# Altium PCB Sensor Brushless Driver V1.0 (Production).PcbDoc (part 1 of 2)
Units mil, origin at the board's own origin, x right, y up, seen from the top; angles counter-clockwise.
Board outline 3550 x 3910 mil, 2 copper layers (Top Layer, Bottom Layer); 141 components, 73 nets, 378 pads, 824 vias.
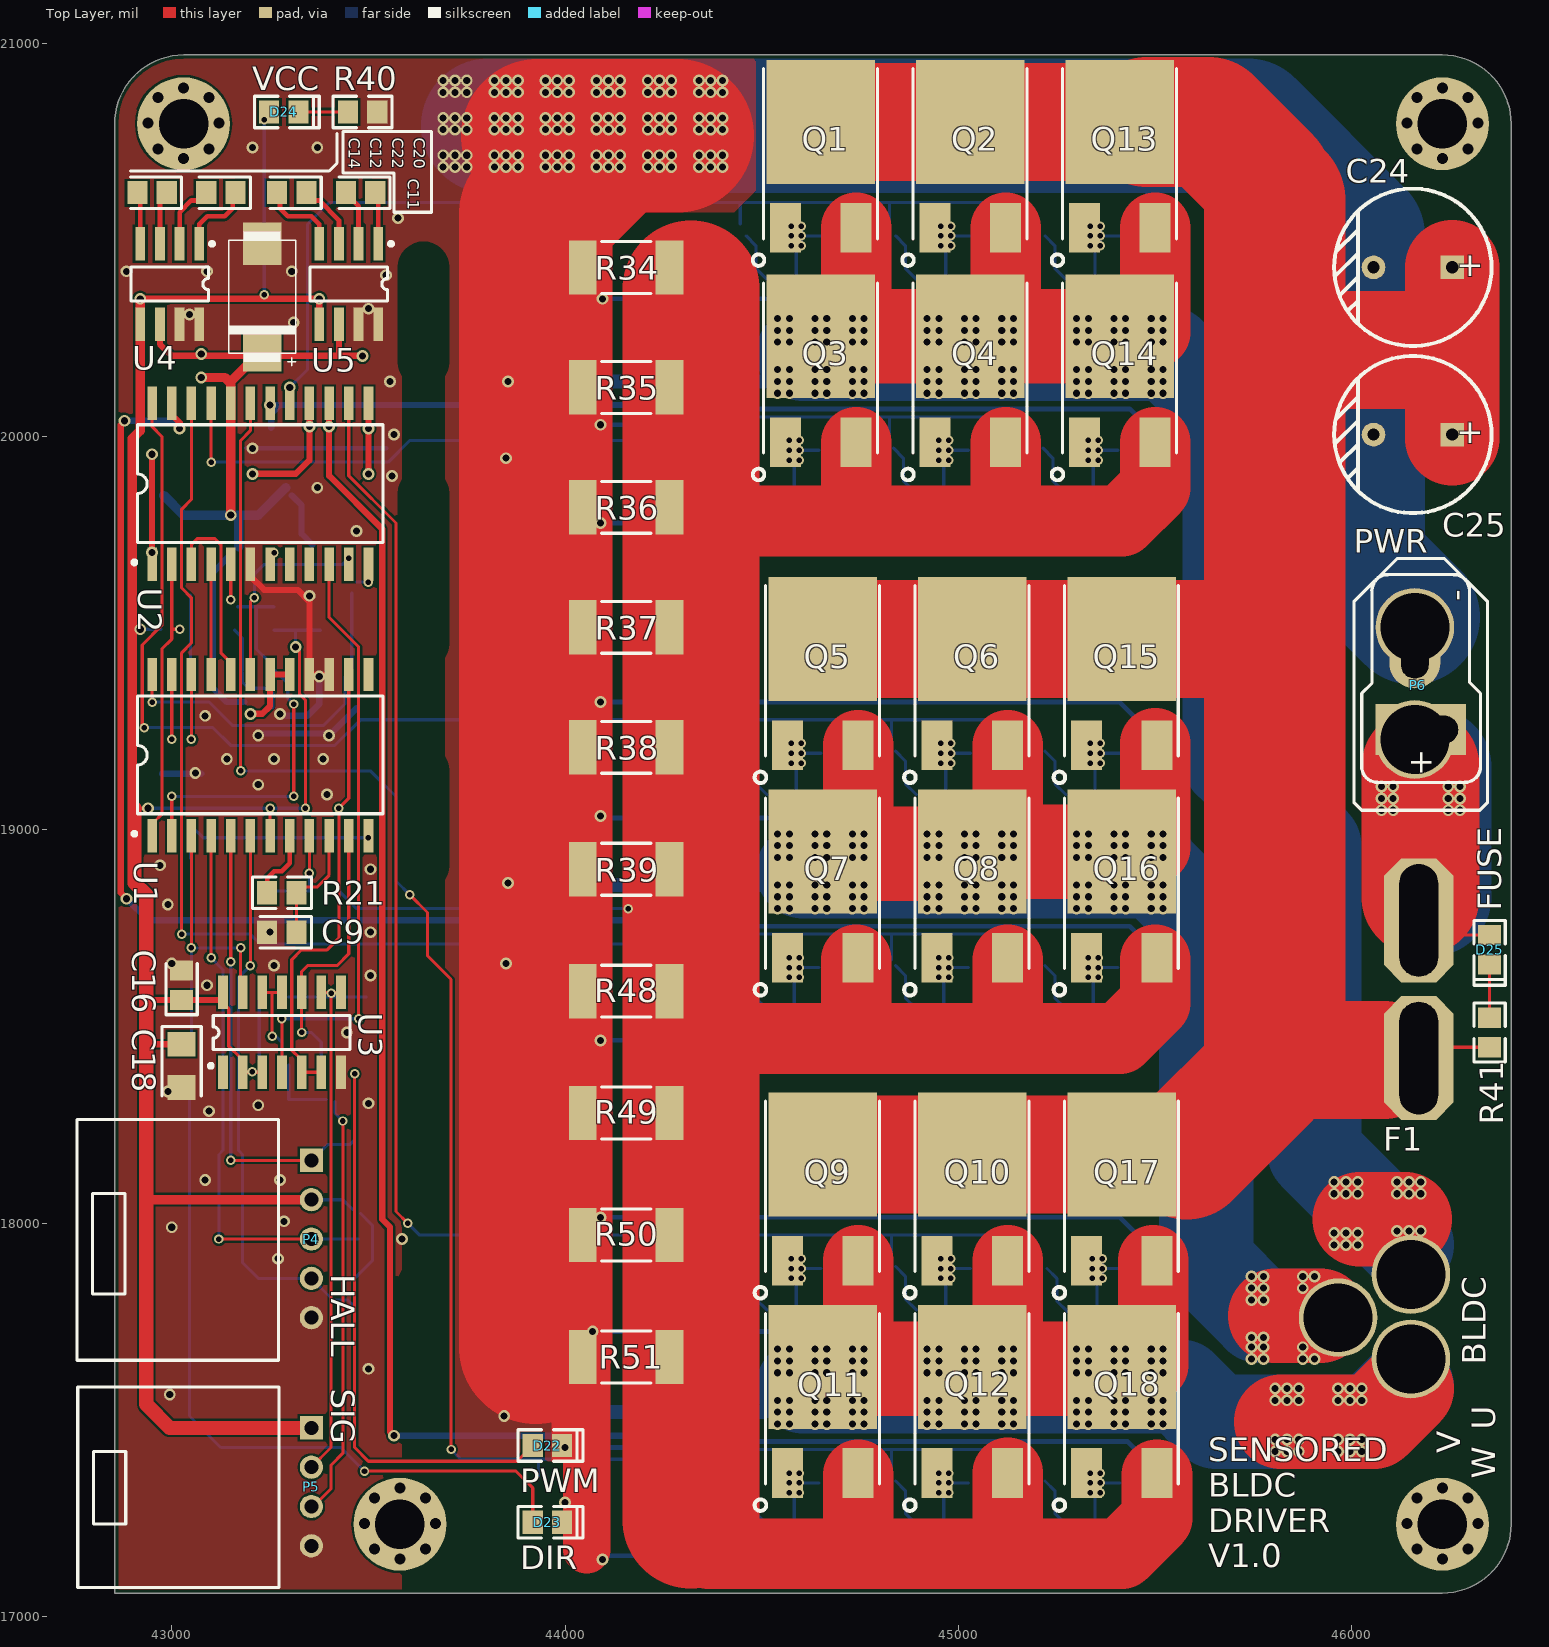
[diagram p0: Top Layer view]
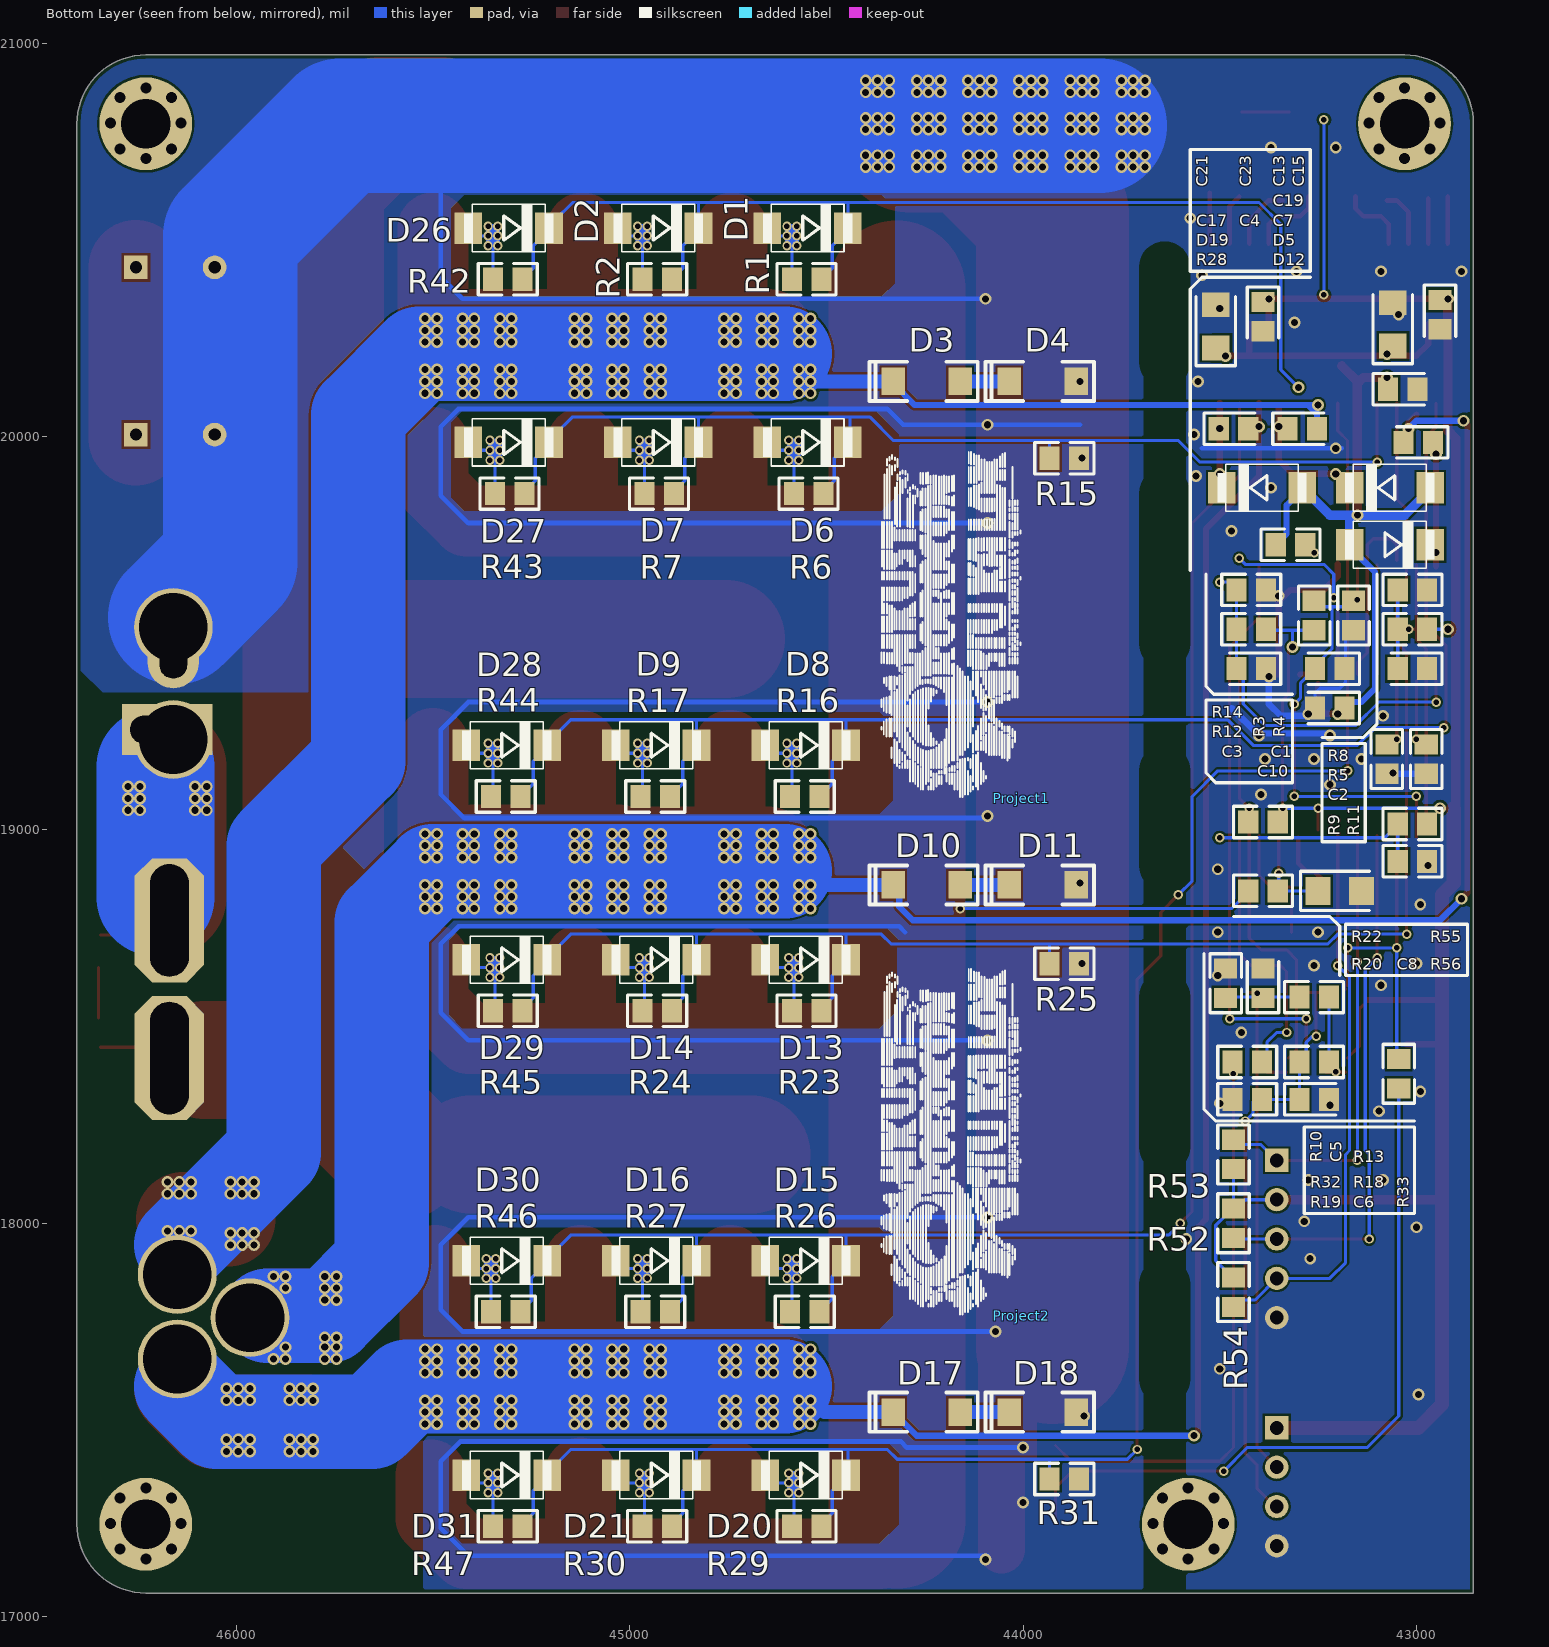
[diagram p1: Bottom Layer view, seen from below]

## Layer stack, top to bottom
Top Solder: solder mask 0.4, Solder Resist, Dk 3.5
Top Layer: signal copper 1.4
Dielectric1: dielectric 12.6, FR-4, Dk 4.8
Bottom Layer: signal copper 1.4
Bottom Solder: solder mask 0.4, Solder Resist, Dk 3.5

## Board outline
42855,17060 46230,17060 ccw(c46230,17235) 46405,17235 46405,20795 ccw(c46230,20795) 46230,20970 43030,20970 ccw(c43030,20795) 42855,20795

## Design rules (kind name [scope] priority, off if disabled: settings)
AssemblyTestPointUsage [All] p1 off:
AssemblyTestpoint [All] p1 off: testpointundercomponent=TRUE minsize=40 maxsize=100 preferedsize=60 minholesize=0 maxholesize=40 preferedholesize=32 testpointgrid=1 usegrid=TRUE gridtolerance=0.01 allowsidetop=TRUE allowsidebottom=TRUE
Clearance [All] p1: gap=6
ComponentClearance [All] p1 off: gap=10 collisioncheckmode=3 verticalgap=10 showdistances=FALSE
DiffPairsRouting [All] p1: maxlimit=9999 minlimit=6 mostfreqgap=10 toplayer_minwidth=6 toplayer_maxwidth=9999 toplayer_prefwidth=10 bottomlayer_minwidth=6 bottomlayer_maxwidth=9999 bottomlayer_prefwidth=10 maxuncoupledlength=500
FabricationTestPointUsage TestPointUsage [All] p1 off: valid=0 allowmultiple=FALSE
FabricationTestpoint Testpoint [(IsPad And (OnTopLayer Or OnBottomLayer))] p1 off: side=3 testpointundercomponent=TRUE minsize=40 maxsize=100 preferedsize=60 minholesize=0 maxholesize=40 preferedholesize=32 testpointgrid=1 allowsidetop=TRUE allowsidebottom=TRUE usegrid=TRUE gridtolerance=0.01
FanoutControl Fanout_BGA [IsBGA] p1 off: bgadir=Out bgaviamode=Centered fanoutstyle=Auto fanoutdirection=Alternating viagrid=1 // Fanout_BGA (Default Rule)
FanoutControl Fanout_LCC [IsLCC] p2 off: bgadir=Out bgaviamode=Centered fanoutstyle=Auto fanoutdirection=Alternating viagrid=1 // Fanout_LCC (Default Rule)
FanoutControl Fanout_SOIC [IsSOIC] p3 off: bgadir=Out bgaviamode=Centered fanoutstyle=Auto fanoutdirection=Alternating viagrid=1 // Fanout_SOIC (Default Rule)
FanoutControl Fanout_Small [(CompPinCount < 5)] p4 off: bgadir=Out bgaviamode=Centered fanoutstyle=Auto fanoutdirection=OutThenIn viagrid=1 // Fanout_Small (Default Rule)
FanoutControl Fanout_Default [All] p5 off: bgadir=Out bgaviamode=Centered fanoutstyle=Auto fanoutdirection=Alternating viagrid=1 // Fanout_Default (Default Rule)
Height [All] p1 off: minheight=0 maxheight=1000 prefheight=500
HoleSize [All] p1: absolutevalues=TRUE maxlimit=99999 minlimit=12 maxpercent=80.000 minpercent=20.000
HoleToHoleClearance [All] p1 off: gap=10 allowstackedmicrovias=TRUE
LayerPairs [All] p1 off: enforce=TRUE
MinimumSolderMaskSliver [All] p1 off: minsoldermaskwidth=10
NetAntennae [All] p1 off: netantennaetolerance=0
PasteMaskExpansion [All] p1 off: expansion=0
PolygonConnect [All] p1: connectstyle=Direct reliefconductorwidth=18 reliefentries=4 polygonreliefangle="90 Angle" airgapwidth=10
RoutingLayers [All] p1 off: top layer_v5=TRUE bottom layer_v5=TRUE
RoutingPriority [All] p1 off: routingpriority=0
RoutingTopology [All] p1 off: topology=Shortest
RoutingVias [All] p1: holewidth=25 width=45 viastyle="Through Hole" minholewidth=12 minwidth=15 maxholewidth=99999 maxwidth=99999
SilkToBoardRegionClearance [All] p1 off:
SilkToSilkClearance [All] p1 off: silktosilkclearance=10
SilkToSolderMaskClearance SilkscreenOverComponentPads [IsPad] p1 off: minsilkscreentomaskgap=10 clearancetoexposedcopper=TRUE
SolderMaskExpansion [All] p1 off: expansion=4
UnpouredPolygon [All] p1: allowunpoured=FALSE
Width [All] p1: maxlimit=99999 minlimit=6 preferedwidth=8 minimp=50.000000 maximp=50.000000 favimp=50.000000
5 further rules are at their usual default settings.

## Components (designator, comment, footprint, x,y, rotation, side; value= is the part's Value field where it differs from the comment)
C1 "10nF" CC2012-0805 43220,19410 r0 bottom
C2 "10nF" CC2012-0805 43010,19410 r0 bottom
C3 "10nF" CC2012-0805 43420,19410 r0 bottom
C4 "4.7uF" CC2012-0805 43290,20020 r180 bottom
C5 "100nF" CC2012-0805 43390,18610 r90 bottom
C6 "100nF" CC2012-0805 43260,18315 r180 bottom
C7 "4.7uF" CC2012-0805 42995,19985 r0 bottom
C8 "10uF" CC3216-1206 43195,18845 r180 bottom
C9 "10nF" CC2012-0805 43280,18740 r180 top
C10 "100nF" CC2012-0805 43220,19310 r0 bottom
C11 "100uF" EIA7343 43230,20355 r270 top
C12 "220nF" CC2012-0805 43125,20620 r180 top
C13 "10uF" CC3216-1206 43060,20285 r90 bottom
C14 "220nF" CC2012-0805 42950,20620 r180 top
C15 "4.7uF" CC2012-0805 42940,20310 r270 bottom
C16 "100nF" CC2012-0805 43025,18605 r90 top
C17 "4.7uF" CC2012-0805 43465,20020 r180 bottom
C18 "10uF" CC3216-1206 43025,18400 r270 top
C19 "100nF" CC2012-0805 43035,20120 r180 bottom
C20 "220nF" CC2012-0805 43480,20620 r180 top
C21 "10uF" CC3216-1206 43510,20280 r90 bottom
C22 "220nF" CC2012-0805 43305,20620 r180 top
C23 "4.7uF" CC2012-0805 43390,20305 r270 bottom
C24 "470uF" CAP10x12 46155,20430 r180 top
C25 "470uF" CAP10x12 46155,20005 r180 top
D1 "MBRS120" SMA 44560,20530 r0 bottom
D2 "MBRS120" SMA 44940,20530 r0 bottom
D3 "1N4148" SOD-80 44245,20140 r0 bottom
D4 "1N4148" SOD-80 43950,20140 r0 bottom
D5 "MBRS120" SMA 43055,19870 r180 bottom
D6 "MBRS120" SMA 44560,19985 r0 bottom
D7 "MBRS120" SMA 44940,19985 r0 bottom
D8 "MBRS120" SMA 44565,19215 r0 bottom
D9 "MBRS120" SMA 44945,19215 r0 bottom
D10 "1N4148" SOD-80 44245,18860 r0 bottom
D11 "1N4148" SOD-80 43950,18860 r0 bottom
D12 "MBRS120" SMA 43080,19725 r0 bottom
D13 "MBRS120" SMA 44565,18670 r0 bottom
D14 "MBRS120" SMA 44945,18670 r0 bottom
D15 "MBRS120" SMA 44565,17905 r0 bottom
D16 "MBRS120" SMA 44945,17905 r0 bottom
D17 "1N4148" SOD-80 44245,17520 r0 bottom
D18 "1N4148" SOD-80 43950,17520 r0 bottom
D19 "MBRS120" SMA 43380,19870 r180 bottom
D20 "MBRS120" SMA 44565,17360 r0 bottom
D21 "MBRS120" SMA 44945,17360 r0 bottom
D22 "PWM" D0805 43955,17435 r0 top
D23 "DIR" D0805 43955,17240 r0 top
D24 "VCC" D0805 43285,20825 r0 top
D25 "FUSE" D0805 46350,18695 r270 top
D26 "MBRS120" SMA 45320,20530 r0 bottom
D27 "MBRS120" SMA 45320,19985 r0 bottom
D28 "MBRS120" SMA 45325,19215 r0 bottom
D29 "MBRS120" SMA 45325,18670 r0 bottom
D30 "MBRS120" SMA 45325,17905 r0 bottom
D31 "MBRS120" SMA 45325,17360 r0 bottom
F1 "20A Fuse" "FUSE SOCKET" 46170,18165 r90 top
P4 "HALL" LOCKEDHDR-5W 43355,17960 r270 top
P5 "SIG" LOCKEDHDR-4W 43355,17330 r270 top
P6 "PWR" T-CONNECTOR(M) 46175,19255 r90 top
Project1 "Project Logo" Robocon_Logo 44005,19080 r90 bottom
Project2 "Project Logo" Robocon_Logo 44005,17765 r90 bottom
Q1 "IRFR48Z" TO-252AA 44650,20665 r0 top
Q2 "IRFR48Z" TO-252AA 45030,20665 r0 top
Q3 "IRFR48Z" TO-252AA 44650,20120 r0 top
Q4 "IRFR48Z" TO-252AA 45030,20120 r0 top
Q5 "IRFR48Z" TO-252AA 44655,19350 r0 top
Q6 "IRFR48Z" TO-252AA 45035,19350 r0 top
Q7 "IRFR48Z" TO-252AA 44655,18810 r0 top
Q8 "IRFR48Z" TO-252AA 45035,18810 r0 top
Q9 "IRFR48Z" TO-252AA 44655,18040 r0 top
Q10 "IRFR48Z" TO-252AA 45035,18040 r0 top
Q11 "IRFR48Z" TO-252AA 44655,17500 r0 top
Q12 "IRFR48Z" TO-252AA 45035,17500 r0 top
Q13 "IRFR48Z" TO-252AA 45410,20665 r0 top
Q14 "IRFR48Z" TO-252AA 45410,20120 r0 top
Q15 "IRFR48Z" TO-252AA 45415,19350 r0 top
Q16 "IRFR48Z" TO-252AA 45415,18810 r0 top
Q17 "IRFR48Z" TO-252AA 45415,18040 r0 top
Q18 "IRFR48Z" TO-252AA 45415,17500 r0 top
R1 "33R" CR2012-0805 44550,20400 r0 bottom
R2 "33R" CR2012-0805 44930,20400 r0 bottom
R3 "330R" CR2012-0805 43260,19545 r270 bottom
R4 "4.7k" CR2012-0805 43160,19545 r270 bottom
R5 "330R" CR2012-0805 43010,19510 r180 bottom
R6 "33R" CR2012-0805 44545,19855 r0 bottom
R7 "33R" CR2012-0805 44925,19855 r0 bottom
R8 "4.7k" CR2012-0805 43010,19610 r180 bottom
R9 "0R" CR2012-0805 43075,19180 r270 bottom
R10 "10k" CR2012-0805 43485,18610 r90 bottom
R11 "0R" CR2012-0805 42975,19180 r270 bottom
R12 "330R" CR2012-0805 43420,19510 r180 bottom
R13 "1k" CR2012-0805 43260,18575 r180 bottom
R14 "4.7k" CR2012-0805 43420,19610 r180 bottom
R15 "4.7k" CR2012-0805 43895,19945 r0 bottom
R16 "33R" CR2012-0805 44555,19085 r0 bottom
R17 "33R" CR2012-0805 44935,19085 r0 bottom
R18 "1k" CR2012-0805 43260,18410 r180 bottom
R19 "10k" CR2012-0805 43430,18315 r0 bottom
R20 "1k" CR2012-0805 43390,18845 r180 bottom
R21 "4.7k" CR2012-0805 43280,18840 r0 top
R22 "10k" CR2012-0805 43390,19020 r180 bottom
R23 "33R" CR2012-0805 44550,18540 r0 bottom
R24 "33R" CR2012-0805 44930,18540 r0 bottom
R25 "4.7k" CR2012-0805 43895,18660 r0 bottom
R26 "33R" CR2012-0805 44555,17775 r0 bottom
R27 "33R" CR2012-0805 44935,17775 r0 bottom
R28 "10k" CR2012-0805 43320,19725 r0 bottom
R29 "33R" CR2012-0805 44550,17230 r0 bottom
R30 "33R" CR2012-0805 44930,17230 r0 bottom
R31 "4.7k" CR2012-0805 43895,17350 r0 bottom
R32 "330R" CR2012-0805 43430,18410 r180 bottom
R33 "330R" CR2012-0805 43045,18380 r90 bottom
R34 "10mR" CR6332-2512 44155,20430 r0 top
R35 "10mR" CR6332-2512 44155,20125 r0 top
R36 "10mR" CR6332-2512 44155,19820 r0 top
R37 "10mR" CR6332-2512 44155,19515 r0 top
R38 "10mR" CR6332-2512 44155,19210 r0 top
R39 "10mR" CR6332-2512 44155,18900 r0 top
R40 "330R" CR2012-0805 43485,20825 r180 top
R41 "4.7k" CR2012-0805 46350,18485 r90 top
R42 "33R" CR2012-0805 45310,20400 r0 bottom
R43 "33R" CR2012-0805 45305,19855 r0 bottom
R44 "33R" CR2012-0805 45315,19085 r0 bottom
R45 "33R" CR2012-0805 45310,18540 r0 bottom
R46 "33R" CR2012-0805 45315,17775 r0 bottom
R47 "33R" CR2012-0805 45310,17230 r0 bottom
R48 "10mR" CR6332-2512 44155,18590 r0 top
R49 "10mR" CR6332-2512 44155,18280 r0 top
R50 "10mR" CR6332-2512 44155,17970 r0 top
R51 "10mR" CR6332-2512 44155,17660 r0 top
R52 "1k" CR2012-0805 43465,18000 r90 bottom (schematic designator R24)
R53 "1k" CR2012-0805 43465,18175 r270 bottom
R54 "1k" CR2012-0805 43465,17825 r90 bottom
R55 "1k" CR2012-0805 43010,19015 r180 bottom
R56 "1k" CR2012-0805 43010,18920 r180 bottom
U1 "MC33035" SOP-24 43225,19190 r0 top
U2 "HIP4086" SOP-24 43225,19880 r0 top
U3 "74HC02" SOP-14 43280,18485 r0 top
U4 "MAX662A" SOP-8 43070,20490 r180 top
U5 "MAX662A" SOP-8 43525,20490 r180 top

## Footprints (in the part's own frame and the unit in brackets; to place one, negate y for a bottom-side part, rotate by r counter-clockwise, add the part's x,y. Pads: shape width x height; smd on the part's side, far side on the other; paste and mask are expansions set on the pad)
CAP10x12 [mil]
  rect 60x60 hole 31.5: 1(-100,0)
  round 60 hole 31.5: 2(100,0)
  silkscreen extent -200,-200 200,200, body extent -198,-198 196,196, height 472
CC2012-0805 [mm] "Chip Capacitor; Body 2.0 x 1.2 mm (LxW typ)"
  rect 1.3x1.5 smd: 1(-0.95,0) 2(0.95,0)
  silkscreen extent -1.91,-1.02 1.4,1.02, body extent -0.99,-0.64 1.01,0.62, height 0.58
CC3216-1206 [mm] "Chip Capacitor; Body 3.2 x 1.6 mm (LxW typ)"
  rect 1.6x1.8 smd: 1(-1.4,0) 2(1.4,0)
  silkscreen extent -2.54,-1.27 1.93,1.27, body extent -1.6,-0.79 1.6,0.81, height 0.76
CR2012-0805 [mm] "Chip Resistor; Body 2.0 x 1.3 mm (LxW typ)"
  rect 1.3x1.5 smd: 1(-0.95,0) 2(0.95,0)
  silkscreen extent -1.91,-1.02 1.91,1.02, body extent -0.98,-0.63 1.02,0.62, height 0.58
CR6332-2512 [mm] "Chip Resistor; Body 6.3 x 3.2 mm (LxW typ)"
  rect 1.8x3.5 smd: 1(-2.8,0) 2(2.8,0)
  silkscreen extent -1.6,-1.68 1.6,1.68, body extent -3.2,-1.6 3.2,1.6, height 0.58
D0805 [mm]
  rect 1.3x1.5 smd: 1(-0.95,0) 2(0.95,0)
  silkscreen extent -1.91,-1.02 2.29,1.02, body extent -0.98,-0.49 1.02,0.51, height 0.48
EIA7343 [mm]
  rect 2.75x2.5 smd: 1(3.429,0) 2(-3.429,0)
  silkscreen extent -4.22,-2.21 4.44,2.21, body extent -3.65,-2.15 3.65,2.15, height 2.8
"FUSE SOCKET" [mm]
  oct 8x4.5 hole 2.5 slot 7.25 at 0 deg: 1(6.477,0) 2(15.367,0)
  body extent 3.04,-1.67 18.78,3.26, height 16.87
LOCKEDHDR-4W [mm] "5-pin header with lock"
  rect 1.5x1.5 hole 0.9: 1(-3.81,0)
  round 1.5 hole 0.9: 2(-1.27,0) 3(1.27,0) 4(3.81,0)
  silkscreen extent -6.45,-15.09 6.5,-2.08
LOCKEDHDR-5W [mm] "5-pin header with lock"
  rect 1.5x1.5 hole 0.9: 1(-5.08,0)
  round 1.5 hole 0.9: 2(-2.54,0) 3(0,0) 4(2.54,0) 5(5.08,0)
  silkscreen extent -7.72,-15.14 7.82,-2.13
Robocon_Logo [mil]
  silkscreen extent 3,2 881,355
SMA [mil]
  rect 70x80 smd: 1(90,0) 2(-115,0)
  silkscreen extent -126,-60 101,60
SOD-80 [mil]
  rect 60x70 smd: 1(-85,0) 2(85,0)
  silkscreen extent -130,-50 145,50, body extent -69,-29 69,30, height 60
SOP-8 [mil]
  rect 25x85 smd: 1(0,0) 2(50,0) 3(100,0) 4(150,0) 5(150,204.72) 6(100,204.72) 7(50,204.72) 8(0,204.72)
  silkscreen extent -37,-5 173,146, body extent -22,-13 171,223, height 67
SOP-14 [mil]
  rect 24.5x85 smd: 1(-149.83,-100.88) 2(-99.83,-100.88) 3(-49.83,-100.88) 4(0.17,-100.88) 5(50.17,-100.88) 6(100.17,-100.88) 7(150.17,-100.88) 8(150.17,101.74) 9(100.17,101.74) 10(50.17,101.74) 11(0.17,101.74) 12(-49.83,101.74) 13(-99.83,101.74) 14(-149.83,101.74)
  silkscreen extent -186,-90 173,43, body extent -170,-123 169,123, height 61
SOP-24 [mil] "Plastic Small Outline; 24 Leads; Body Width 7.5 mm"
  rect 24.5x85 smd: 1(-275,-205) 2(-225,-205) 3(-175,-205) 4(-125,-205) 5(-75,-205) 6(-25,-205) 7(25,-205) 8(75,-205) 9(125,-205) 10(175,-205) 11(225,-205) 12(275,-205) 13(275,205) 14(225,205) 15(175,205) 16(125,205) 17(75,205) 18(25,205) 19(-25,205) 20(-75,205) 21(-125,205) 22(-175,205) 23(-225,205) 24(-275,205)
  silkscreen extent -325,-205 312,150, body extent -309,-213 309,199, height 73
T-CONNECTOR(M) [mil]
  rect 130x230 hole 70 slot 190 at 90 deg: 1(0,0)
  oval 240x130 hole 70 slot 190 at 0 deg: 2(225,15)
  silkscreen extent -134,-152 394,150, body extent -134,-155 398,152, height 598
TO-252AA [mm] "D-PAK/TO-252-AA; 3 Leads (1 Cropped); Body 10.4 (inc. leads) x 6.7 mm (LxW max)"
  rect 2x3.2 smd: 1(-2.285,-3.425) 3(2.285,-3.425)
  rect 7x8 smd: 4(0,3.425)
  silkscreen extent -4.4,-5.87 3.65,6.88

## Part data
C1 C2 C3 C4 C5 C6 C7 C8 C9 C10 C12 C13 C14 C15 C16 C17 C18 C19 C20 C21 C22 C23: library part "Cap Semi", "Capacitor (Semiconductor SIM Model)"
C11: library part "Cap Pol SMD", "Polarized Capacitor (Axial)"
C24 C25: library part "Cap Pol DIP", "Polarized Capacitor (Radial)"
D1 D2 D5 D6 D7 D8 D9 D12 D13 D14 D15 D16 D19 D20 D21 D26 D27 D28 D29 D30 D31: library part "D Schottky", "Schottky Diode"
D3 D4 D10 D11 D17 D18: library part "D General", "General Purpose Diode"
D22 D23 D24 D25: library part LED, "Typical RED GaAs LED"
F1: library part Fuse, "Fuse"
P4: library part "Header 5", "Header, 5-Pin"
P5: library part "Header 4", "Header, 4-Pin"
P6: library part "Header 2", "Header, 2-Pin"
Q1 Q2 Q3 Q4 Q5 Q6 Q7 Q8 Q9 Q10 Q11 Q12 Q13 Q14 Q15 Q16 Q17 Q18: "HEXFET N-Channel Power MOSFET"
R1 R2 R3 R4 R5 R6 R7 R8 R9 R10 R11 R12 R13 R14 R15 R16 R17 R18 R19 R20 R21 R22 R23 R24 R25 R26 R27 R28 R29 R30 R31 R32 R33 R34 R35 R36 R37 R38 R39 R40 R41 R42 R43 R44 R45 R46 R47 R48 R49 R50 R51 R52 R53 R54 R55 R56: library part "Res Semi", "Semiconductor Resistor"
U1: "80V/2.5A Peak, High Frequency Full / Bridge FET Driver"
U2: "80V, 500mA, 3-Phase MOSFET Driver80V, 500mA, 3-Phase MOSFET Driver"
U3: "Quadruple 2-Input Positive-NOR Gate"
U4 U5: "5V to 12V Charge Pump"

## Free pads (board coordinates)
  round 236.22 hole 125.98: 0(43030,20795) 0(43580,17235) 0(46230,17235) 0(46230,20795)
  round 200 hole 175: 0(45965,17760) 0(46150,17655) 0(46150,17870) 1(46160,19230) 1(46160,19515)

## Via types
v1: diameter 30, hole 18, Top Layer to Bottom Layer, 596 vias
v2: diameter 24, hole 14, Top Layer to Bottom Layer, 196 vias
v3: diameter 45, hole 28, Top Layer to Bottom Layer, 32 vias

## Nets (pads, with @x,y where several pads share a name; then routed paths per layer and width w, separated by ;. In a path a pad name is that pad's centre, name@x,y a point inside that pad or via, vN(x,y) a via of type N, cw(c..) or ccw(c..) an arc to the next point about the centre after c; other vN are vias at no path point)
AHI: C1.2 R3.1 R4.1 U1.2 U2.5 | length 1084
  Top Layer w8: U1.2@43000,18980 U1.2@43000,18985 v2(43000,19085) ; v2(43150,19585) U2.5@43150,19665 ; v2(43310,19085) v2(43310,19320)
  Bottom Layer w8: v2(43000,19085) v2(43310,19085) ; R4.1@43167.6,19567.4 43215,19567.4 ; C1.2@43245,19430 43215,19460 43215,19567.4 ; C1.2@43257.4,19410 43295,19372.4 43295,19335 v2(43310,19320) ; R3.1@43260,19567.4 43215,19567.4
ALI: U1.21 U2.4 | length 280
  Top Layer w8: U1.21@43100,19395 U2.4@43100,19675
BHI: C2.2 R5.1 R8.1 U1.1 U2.2 | length 881
  Top Layer w8: U1.1@42955,19020 42975,19040 42975,19460 43000,19485 43000,19510 ; U2.2@43000,19675 43000,19510 ; v2(43020,19510) 43000,19510
  Bottom Layer w8: C2.2@43047.6,19410 R8.1@43047.6,19597.4
BLI: U1.20 U2.3 | length 467.8
  Top Layer w8: U2.3@43050,19685 43050,19725 43065,19740 43110,19740 43125,19725 43125,19450 43150,19425 U1.20@43150,19395
BRAKE: R11.1 U1.23 | length 150
  Top Layer w8: v2(43000,19230) U1.23@43000,19380
CHI: C3.2 R12.1 R14.1 U1.24 U2.12 | length 900
  Top Layer w8: v2(42950,19325) U1.24@42950,19395
  Bottom Layer w8: v2(42950,19325) 43095,19325 43155,19265 43385,19265 43440,19320 C3.2@43440,19390 ; C3.2@43457.4,19410 R14.1@43457.4,19602.4 ; R14.1@43470,19630 v2(43500,19630)
CLI: U1.19 U2.11 | length 520.7
  Top Layer w8: U1.19@43200,19390 43200,19580 v2(43210,19590)
  Bottom Layer w8: v2(43210,19590) 43210,19650 43235,19675 43435,19675 v2(43450,19690)
D\I\R\: C6.1 P5.3 R18.1 R19.1 U3.11 U3.12 | length 1478
  Top Layer w8: U3.12@43230.17,18586.74 43255,18586.74 ; v2(43255,18475) 43255,18586.74 ; U3.11@43278.25,18586.74 43255,18586.74 ; P5.3@43360,17280 43405,17325 43405,17385 43435,17415 v2(43435,18260)
  Bottom Layer w8: v2(43255,18475) 43265,18475 43280,18460 R18.1@43280,18425 ; R18.1@43297.4,18402.4 C6.1@43297.4,18315 R19.1@43392.6,18315 ; R19.1@43415,18310 43415,18280 v2(43435,18260)
DIR: R33.2 U1.3 U3.13 | length 779.1
  Top Layer w8: v2(43050,18700) U1.3@43050,18985 ; U3.13@43175,18605 v2(43175,18700) ; U3.13@43180,18595 43185,18600 U3.13@43180,18605
  Bottom Layer w8: R33.2@43050,18430 v2(43050,18700) ; 43065,18700 v2(43175,18700) v2@43180,18700
ERRINV: R55.1 R56.1 U1.12 | length 558.5
  Bottom Layer w8: R56.1@43047.4,18927.6 R55.1@43047.4,19012.6 ; R55.1@43047.4,19015 R55.1@43047.4,19012.6 ; v2@43505,18980 43080,18980 R55.1@43047.4,19012.6
  other v2: 43500,18980
FAULT: R22.1 U1.14 U3.5 U3.6 | length 1130.4
  Top Layer w8: U3.5@43325,18420 43305,18440 43305,18670 43330,18695 43395,18695 43425,18725 v2(43425,19055) 43450,19080 U1.14@43450,19395 ; U3.5@43330.17,18384.12 U3.6@43379.11,18384.12
GND: C1.1 C2.1 C3.1 C5.2 C6.2 C8.2 C9.2 C10.2 C11.2 C13.2 C15.2 C16.2 C18.2 C19.2 C21.2 C23.2 C24.2 C25.2 D4.1 D11.1 D18.1 D22.2 D23.2 P4.5 P5.4 P6.2 pad.1@46160,19515 R4.2 R8.2 R9.2 R10.2 R11.2 R14.2 R15.1 R19.2 R25.1 R31.1 R34.1 R35.1 R36.1 R37.1 R38.1 R39.1 R40.1 R48.1 R49.1 R50.1 R51.1 R56.2 U1.15 U1.16 U2.6 U3.7 U4.7 U4.8 U5.7 U5.8 | length 25814.1
  Top Layer w16: U2.6@43200,19675 43200,19645 43235,19610 43320,19610 43350,19580 U1.16@43350,19395 43395,19395 U1.15@43400,19400
  Top Layer w120: 44055,17170 R51.1@44055,17670
  Top Layer w390: 43925,17685 43925,20565 44075,20715 44075,20765 ; 43930,20765 44285,20765
  Bottom Layer w8: R4.2@43160,19507.6 43180,19487.6 C1.1@43180,19405 ; C1.1@43180,19400 43180,19375 43195,19360 43245,19360 43257.4,19347.6 C10.2@43257.4,19310
  Bottom Layer w12: v1@43190,19970 43545,19970 ; 43855,20030 44305,20030 44345,20070 45435,20070 45480,20025 45480,19850 45410,19780 v1(44090,19780) v1@44085,19780 ; v1(44000,17430) 44295,17430 44310,17445 45430,17445 45480,17395 45480,17225 45410,17155 v1@44090,17155 ; v1@44075,17725 45425,17725 45480,17780 45480,17945 45410,18015 v1(44090,18015) ; v1@44085,19030 45420,19030 45480,19090 45480,19255 45410,19325 v1@44085,19325 ; v1(44090,18465) 45410,18465 45480,18535 45480,18710 45435,18755 44315,18755 44300,18740 ; v1(44095,20350) 45425,20350 45480,20405 45480,20660
  Bottom Layer w16: R11.2@42975,19142.6 R9.2@43075,19142.6 ; v1@43220,19245 43405,19245 43470,19310 ; C10.2@43270,19290 43345,19290 43375,19320 v1(43375,19390)
  Bottom Layer w342: 43805,20790 45735,20790 46015,20510 46015,19680 pad.1@46155,19540
  other v1: 44095,17145 44000,17290 43845,17510 42995,17565 43500,17630 44070,17725 43270,17910 43585,17960 43000,17990 43285,18005 43085,18110 43275,18110 43095,18285 43220,18300 43500,18305 42990,18335 43445,18485 43090,18605 43505,18630 43260,18655 43000,18660 43850,18660 43250,18740 43505,18740 42990,18810 43855,18865 43505,18900 42970,18910 44090,19035 43395,19090 43220,19115 43060,19145 43140,19180 43260,19180 43385,19180 43220,19240 43400,19240 43085,19290 43275,19295 44090,19325 43350,19595 43470,19760 43370,19870 43560,19900 43850,19945 43205,19970 43565,20005 44090,20030 43555,20140 43855,20140 43310,20290 43045,20310 43500,20325 43545,20410 42885,20420 43090,20420 43305,20420 43575,20555 43690,20685 43720,20685 43750,20685 43820,20685 43850,20685 43880,20685 43950,20685 43980,20685 44010,20685 44080,20685 44110,20685 44140,20685 44210,20685 44240,20685 44270,20685 44340,20685 44370,20685 44400,20685 43690,20715 43720,20715 43750,20715 43820,20715 43850,20715 43880,20715 43950,20715 43980,20715 44010,20715 44080,20715 44110,20715 44140,20715 44210,20715 44240,20715 44270,20715 44340,20715 44370,20715 44400,20715 43205,20735 43370,20735 43690,20780 43720,20780 43750,20780 43820,20780 43850,20780 43880,20780 43950,20780 43980,20780 44010,20780 44080,20780 44110,20780 44140,20780 44210,20780 44240,20780 44270,20780 44340,20780 44370,20780 44400,20780 43690,20810 43720,20810 43750,20810 43820,20810 43850,20810 43880,20810 43950,20810 43980,20810 44010,20810 44080,20810 44110,20810 44140,20810 44210,20810 44240,20810 44270,20810 44340,20810 44370,20810 44400,20810 43690,20875 43720,20875 43750,20875 43820,20875 43850,20875 43880,20875 43950,20875 43980,20875 44010,20875 44080,20875 44110,20875 44140,20875 44210,20875 44240,20875 44270,20875 44340,20875 44370,20875 44400,20875 43690,20905 43720,20905 43750,20905 43820,20905 43850,20905 43880,20905 43950,20905 43980,20905 44010,20905 44080,20905 44110,20905 44140,20905 44210,20905 44240,20905 44270,20905 44340,20905 44370,20905 44400,20905
HALLA: P4.3 R52.1 U1.4 | length 1396.6
  Top Layer w8: v2(43100,18675) U1.4@43100,18985 ; v2(43120,17960) P4.3@43355,17960
  Bottom Layer w8: v2(43100,18675) 43130,18645 43130,18185 43120,18175 v2(43120,17960) ; P4.3@43355,17960 R52.1@43475,17960
HALLB: P4.1 R53.1 U1.5 | length 1161.7
  Top Layer w8: v2(43150,18160) P4.1@43355,18160 P4.1@43360,18160 ; v2(43150,18665) U1.5@43150,18985
  Bottom Layer w8: v2@43150,18165 v2(43150,18665) ; P4.1@43355,18160 43395,18200 43452.6,18200 R53.1@43465,18212.4
HALLC: P4.4 R54.1 U1.6 | length 1433.1
  Top Layer w8: v2(43200,18655) U1.6@43200,18985
  Bottom Layer w8: v2(43200,18655) 43170,18625 43170,18185 43180,18175 43180,17900 43220,17860 P4.4@43355,17860 43410,17805 43447.6,17805 R54.1@43465,17787.6
ISENS: Q3.3 Q4.3 Q7.3 Q8.3 Q11.3 Q12.3 Q14.3 Q16.3 Q18.3 R20.1 R34.2 R35.2 R36.2 R37.2 R38.2 R39.2 R48.2 R49.2 R50.2 R51.2 | length 8884
  Top Layer w8: v2@44150,18800 44260,18800
  Top Layer w180: 44365,17160 45415,17160 45504.96,17249.96 Q18.3@45504.96,17360.16 ; 44370,18470 45410,18470 45499.96,18559.96 Q16.3@45499.96,18670.16 ; 44370,19785 45415,19785 45500,19870 ; 44739.96,18489.96 Q7.3@44739.96,18670.16 ; 44739.96,19804.96 Q3.3@44739.96,19985.16 ; 44744.96,17179.96 Q11.3@44744.96,17360.16 ; 45119.96,19835 Q4.3@45119.96,19985.16 ; 45124.96,17184.96 Q12.3@45124.96,17365.16 ; 45124.96,18489.96 Q8.3@45124.96,18670.16 ; 45499.96,19874.96 Q14.3@45499.96,19985.16
  Top Layer w348: 44320,17245 44320,20375
  Bottom Layer w8: R20.1@43427.4,18845 43427.4,18842.6 43470,18800 v2(44160,18800)
MU: C4.2 D3.2 pad.0@46150,17870 Q1.3 Q2.3 Q3.4 Q4.4 Q13.3 Q14.4 U2.18 | length 6455.3
  Top Layer w180: Q3.4@44739.96,20269.96 Q1.3@44739.96,20530.16 ; Q4.4@45119.96,20264.96 Q2.3@45119.96,20530.16 ; Q14.4@45499.96,20264.96 Q13.3@45499.96,20530.16
  Top Layer w240: Q3.4@44650,20254.84 Q4.4@45014.84,20254.84 ; Q4.4@45030,20254.84 Q14.4@45394.84,20254.84 ; 46020,18010 46135,18010
  Bottom Layer w16: v1(43250,20080) 43275,20080 ; C4.2@43252.6,20022.6 43252.6,20057.6 43275,20080 ; D3.2@44330,20140 44330,20135 44275,20080 43275,20080
  Bottom Layer w36: D3.2@44330,20140 v1@44530,20140
  Bottom Layer w240: 44605,20210 45535,20210 45690,20055 45690,19175 45905,18960 45905,18180 pad.0@46140,17945
  other v1: 45955,17945 45985,17945 46015,17945 45955,17975 45985,17975 46015,17975 46115,17980 46145,17980 46175,17980 45955,18075 45985,18075 46015,18075 46115,18075 46145,18075 46175,18075 45955,18105 45985,18105 46015,18105 46115,18105 46145,18105 46175,18105 44540,20110 44570,20110 44635,20110 44665,20110 44730,20110 44760,20110 44920,20110 44950,20110 45015,20110 45045,20110 45110,20110 45140,20110 45300,20110 45330,20110 45395,20110 45425,20110 45490,20110 45520,20110 44540,20140 44570,20140 44635,20140 44665,20140 44730,20140 44760,20140 44920,20140 44950,20140 45015,20140 45045,20140 45110,20140 45140,20140 45300,20140 45330,20140 45395,20140 45425,20140 45490,20140 45520,20140 44540,20170 44570,20170 44635,20170 44665,20170 44730,20170 44760,20170 44920,20170 44950,20170 45015,20170 45045,20170 45110,20170 45140,20170 45300,20170 45330,20170 45395,20170 45425,20170 45490,20170 45520,20170 44540,20240 44570,20240 44635,20240 44665,20240 44730,20240 44760,20240 44920,20240 44950,20240 45015,20240 45045,20240 45110,20240 45140,20240 45300,20240 45330,20240 45395,20240 45425,20240 45490,20240 45520,20240 44540,20270 44570,20270 44635,20270 44665,20270 44730,20270 44760,20270 44920,20270 44950,20270 45015,20270 45045,20270 45110,20270 45140,20270 45300,20270 45330,20270 45395,20270 45425,20270 45490,20270 45520,20270 44540,20300 44570,20300 44635,20300 44665,20300 44730,20300 44760,20300 44920,20300 44950,20300 45015,20300 45045,20300 45110,20300 45140,20300 45300,20300 45330,20300 45395,20300 45425,20300 45490,20300 45520,20300